# Altium PCB CZ101_V1.0.PcbDoc
Units mm, origin at the board's own origin, x right, y up, seen from the top; angles counter-clockwise.
Board outline 46 x 48 mm, 2 copper layers (Top Layer, Bottom Layer); 51 components, 31 nets, 122 pads, 0 vias.
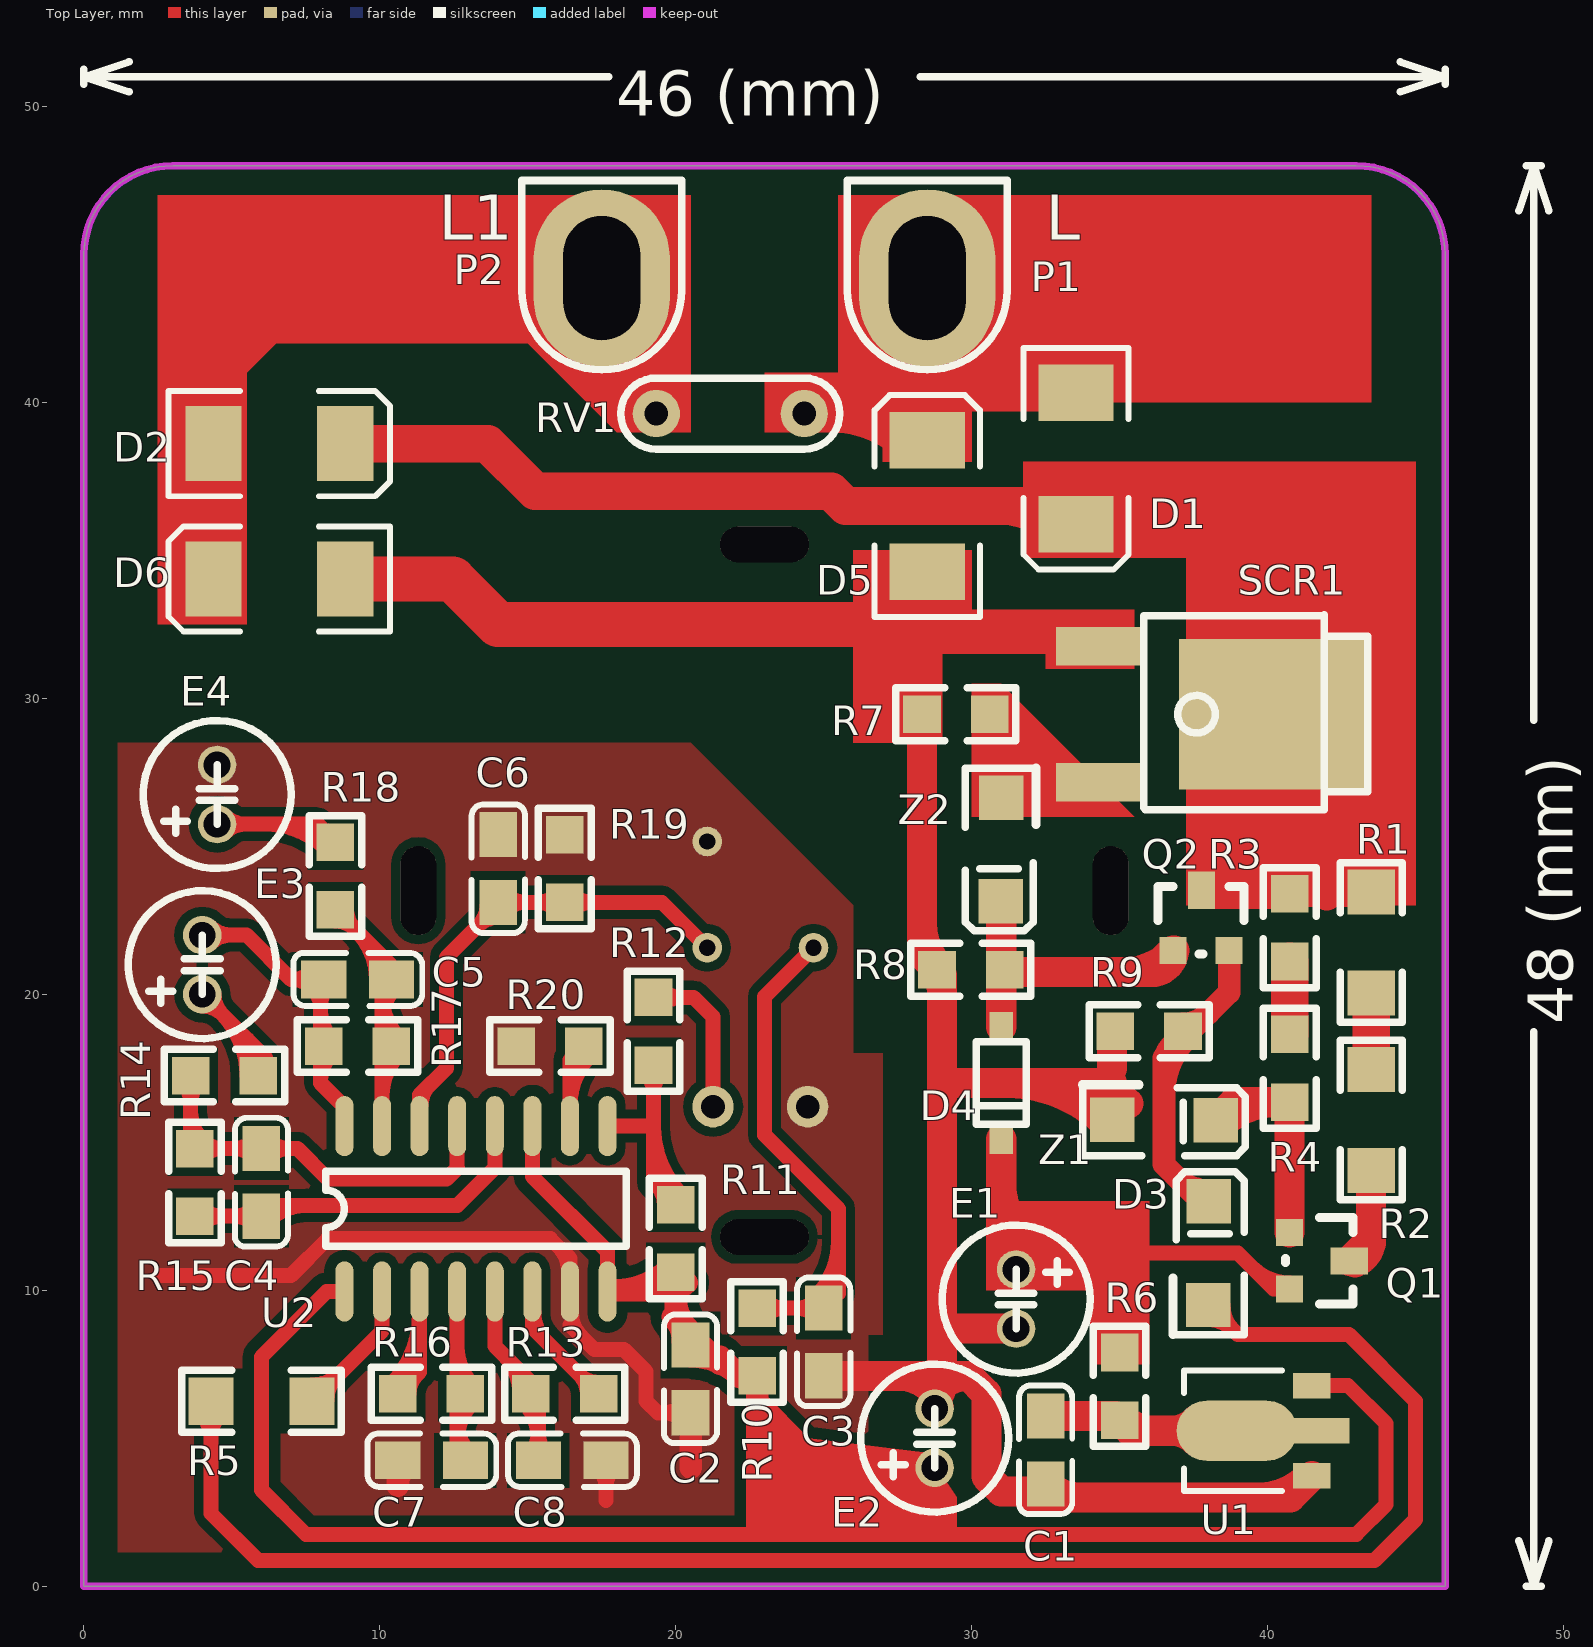
[diagram p0: Top Layer view]
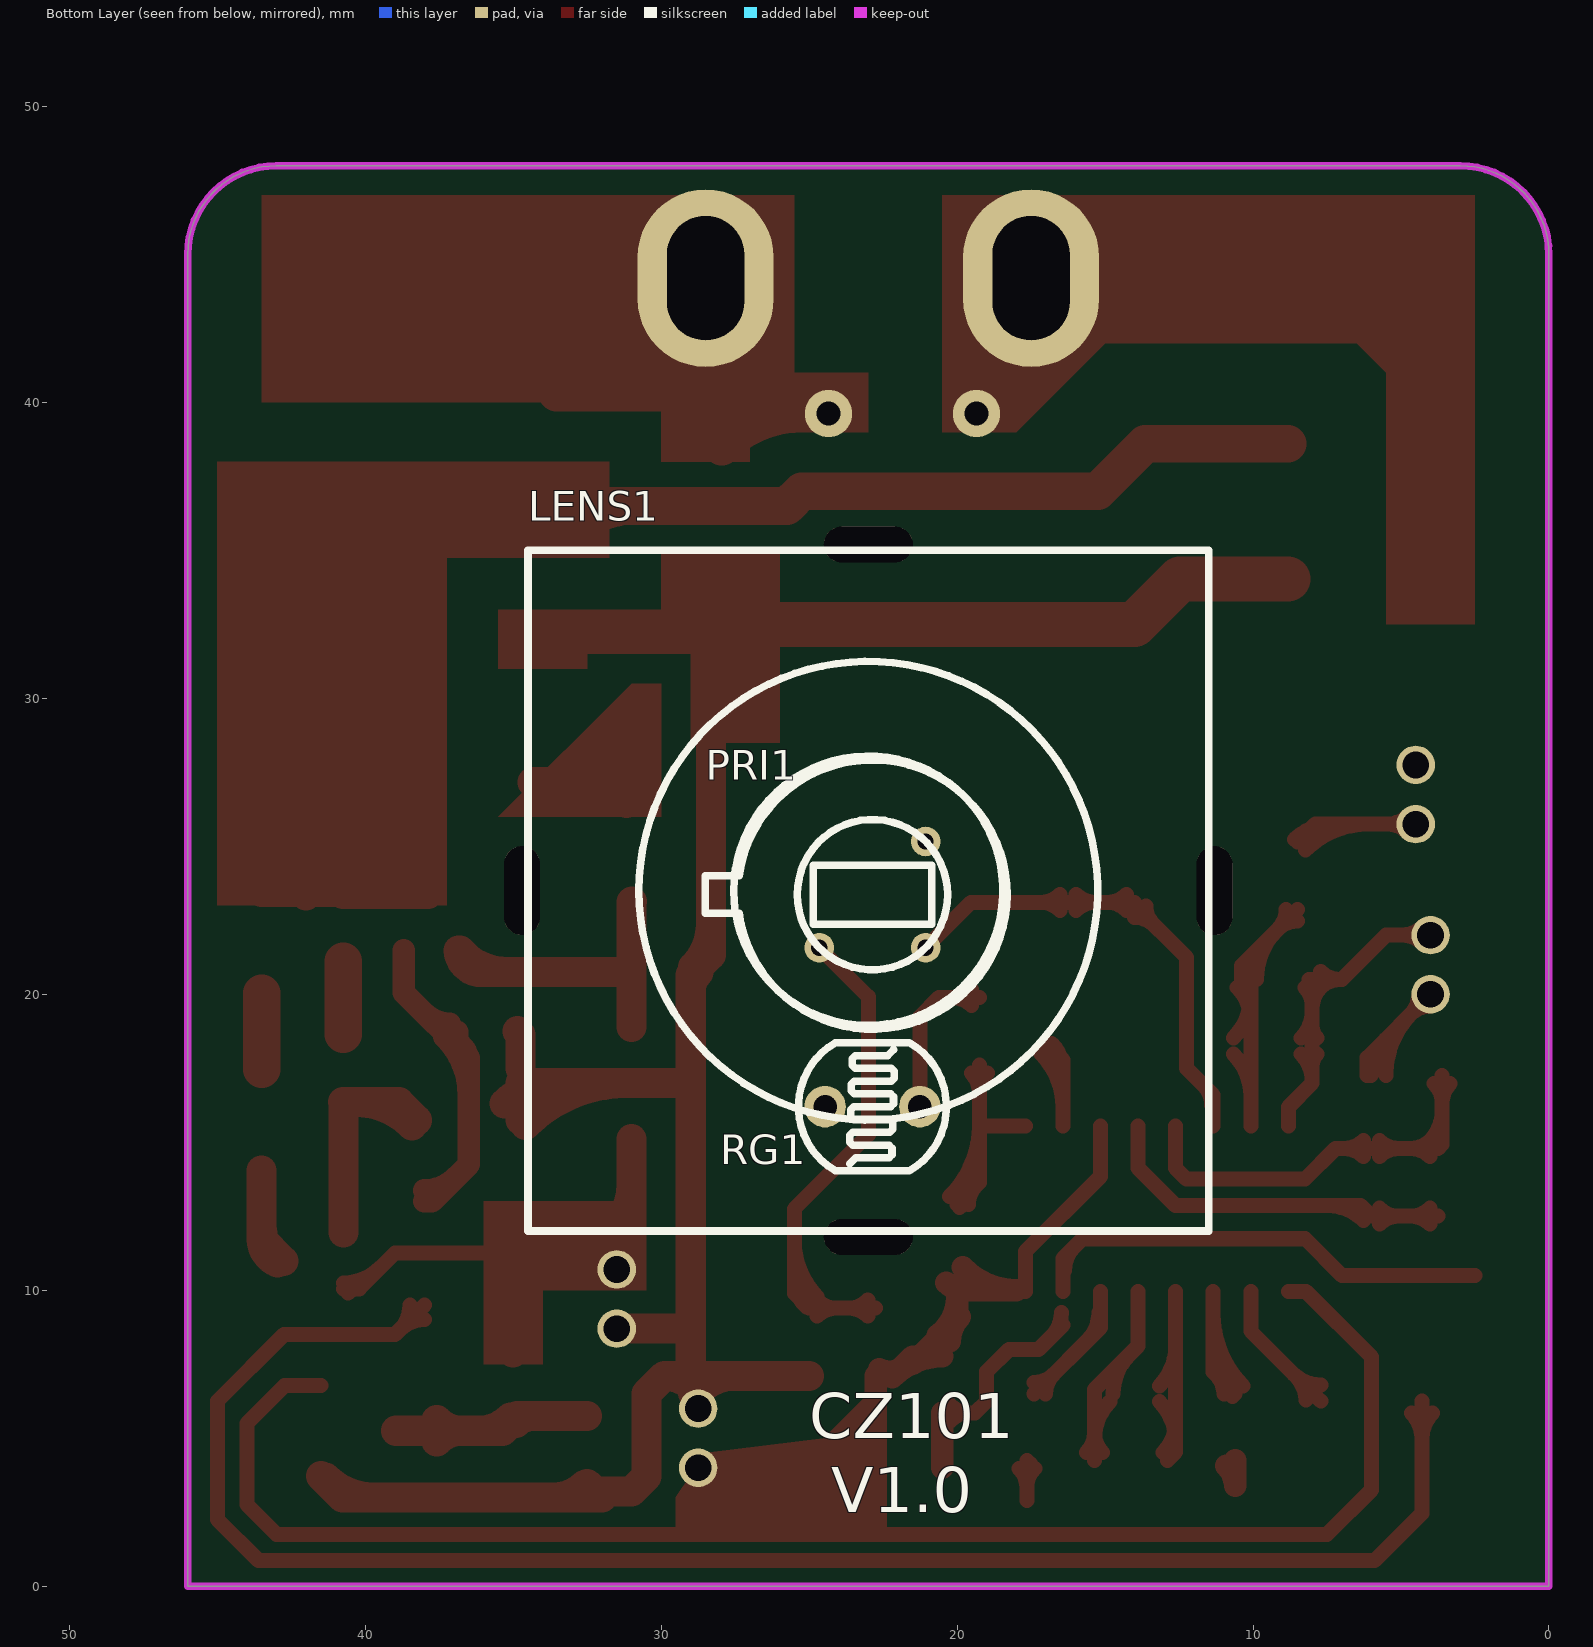
[diagram p1: Bottom Layer view, seen from below]

## Layer stack, top to bottom
Top Layer: signal copper 0.0356
Dielectric: dielectric 0.32, FR-4, Dk 4.8
Bottom Layer: signal copper 0.0356

## Board outline
0,0 46,0 46,45 ccw(c43,45) 43,48 3,48 ccw(c3,45) 0,45

## Design rules (kind name [scope] priority, off if disabled: settings)
Clearance "InPolygon to Keep-Out Layer" [InPolygon vs OnLayer('Keep-Out Layer')] p1: gap=1
Clearance "GND to +3.3V" [InNet('GND') vs InNet('+3.3V')] p2: gap=0.381
Clearance "GND to All" [InNet('GND')] p3: gap=0.305
Clearance [All] p4: gap=0.254
HoleSize [All] p1: absolutevalues=TRUE maxlimit=25.4 minlimit=0.025 maxpercent=80.000 minpercent=20.000
MinimumSolderMaskSliver [All] p1: minsoldermaskwidth=0
PolygonConnect [All] p1: connectstyle=Direct reliefconductorwidth=0.254 reliefentries=4 polygonreliefangle="90 Angle"
RoutingVias [All] p1: holewidth=0.711 width=1.27 viastyle="Through Hole" minholewidth=0.711 minwidth=1.27 maxholewidth=0.711 maxwidth=1.27
SilkToSilkClearance [All] p1: silktosilkclearance=0
SilkscreenOverComponentPads [All] p1: minsilkscreentomaskgap=0
SolderMaskExpansion [All] p1: expansion=0.102
Width [All] p1: maxlimit=25.4 minlimit=0.254 preferedwidth=0.254
24 further rules are at their usual default settings.

## Components (designator, comment, footprint, x,y, rotation, side; value= is the part's Value field where it differs from the comment)
C1 "100nF" 0805_C1 32.5,4.6 r270 top
C2 "100nF" 0805_C1 20.5,7 r270 top
C3 "100nF" 0805_C1 25,8.25 r270 top
C4 "10nF" 0805_C1 6,13.643 r270 top
C5 "10nF" 0805_C1 9.25,20.5 r180 top
C6 "10nF" 0805_C1 14,24.25 r90 top
C7 "10nF" 0805_C1 11.75,4.25 r180 top
C8 "100nF" 0805_C1 16.5,4.25 r180 top
D1 "M7" DO-214AC(SMA) 33.528,38.1 r90 top
D2 "M7" DO-214AC(SMA) 6.604,38.608 r180 top
D3 "IN4148" LL-34 38,11.25 r270 top
D4 "1N4007W/A7" SOD-123 31,17 r90 top
D5 "M7" DO-214AC(SMA) 28.5,36.5 r270 top
D6 "M7" DO-214AC(SMA) 6.604,34.036 r0 top
E1 "47uF/25V" CS_47uF/25V 31.5,9.7 r270 top
E2 "47uF/25V" CS_47uF/25V 28.75,5 r90 top
E3 "22uF/50V" CS_47uF/25V 4,21 r90 top
E4 "22uF/50V" CS_47uF/25V 4.5,26.75 r90 top
LENS1 "Fresnel lens" "Fresnel lens" 23,23.5 r180 bottom locked
P1 "L" CP3M*8.8 28.5,47.5 r180 top locked
P2 "L1" CP3M*8.8 17.5,47.5 r180 top locked
PRI1 "D203S" D203S 22.86,23.368 r315 bottom locked
Q1 "MMBTA44/3D" SOT-23 41.75,11 r270 top
Q2 "MCR100-6/MCR16" SOT-23 37.75,22.5 r0 top
R1 "200K" 1206_R 43.5,21.75 r270 top
R2 "200K" 1206_R 43.5,15.75 r270 top
R3 "20M" 0805_R 40.75,22.25 r270 top
R4 "20M" 0805_R 40.75,17.5 r270 top
R5 "10K" 1206_R 6,6.25 r0 top
R6 "510R" 0805_R 35,6.75 r270 top
R7 "47K" 0805_R 29.464,29.464 r0 top
R8 "1K" 0805_R 29.972,20.828 r0 top
R9 "47K" 0805_R 36,18.75 r0 top
R10 "10K" 0805_R 22.75,8.25 r270 top
R11 "1M" 0805_R 20,11.75 r270 top
R12 "180K" 0805_R 19.25,18.75 r270 top
R13 "1M" 0805_R 16.25,6.5 r180 top
R14 "10K" 0805_R 4.75,17.25 r180 top
R15 "1.5M" 0805_R 3.75,13.643 r270 top
R16 "180K" 0805_R 11.75,6.5 r180 top
R17 "2M" 0805_R 9.25,18.25 r0 top
R18 "47K" 0805_R 8.5,24 r270 top
R19 "47K" 0805_R 16.25,24.25 r270 top
R20 "1.5M" 0805_R 15.75,18.25 r0 top
RG1 "GL5528" R5537 22.86,16.2 r180 bottom locked
RV1 "07D471K" RV-5MM 21.844,39.624 r0 top
SCR1 "BT136" TO-252 37.592,29.464 r270 top
U1 "HT7533-1" SOT-89 41.5,5.25 r90 top
U2 "BISS0001" SO-16 13.25,12.75 r90 top
Z1 "ZMM5V6" LL-34 36.5,15.75 r180 top
Z2 "ZMM5V6" LL-34 30.988,24.892 r90 top

## Footprints (in the part's own frame and the unit in brackets; to place one, negate y for a bottom-side part, rotate by r counter-clockwise, add the part's x,y. Pads: shape width x height; smd on the part's side, far side on the other; paste and mask are expansions set on the pad)
0805_C1 [mil]
  rect 60x50 smd: 1(-45,0) 2(45,0)
  silkscreen extent -86,-35 85,35
0805_R [mil] "SMD Resistor"
  rect 50x50 smd: 1(-45,0) 2(45,0)
  silkscreen extent -80,-35 80,35
1206_R [mm] "SMD Resistor"
  rect 1.52x1.6 smd: 1(-1.71,0) 2(1.71,0)
  silkscreen extent -2.7,-1.05 2.7,1.05
CP3M*8.8 [mm]
  oval 4.6x6 hole 2.6 slot 4.2 at 90 deg: 1(0,3.3)
  silkscreen extent -2.7,0 2.7,6.4
CS_47uF/25V [mm] "PTH  Electrolytic  Capacitor"
  round 1.3 hole 0.9: 1(-1,0) 2(1,0)
  silkscreen extent -2.5,-2.5 2.5,2.5
D203S [mm] "D203S, KP500BP"
  round 1 hole 0.55: 1(2.54,0) 2(0,2.54) 3(-2.54,0)
  silkscreen extent -4.55,-4.55 4.55,4.55
DO-214AC(SMA) [mil] "SMD Diode"
  rect 75x100 smd: A(87.5,0) K(-87.5,0)
  silkscreen extent -147,-70 148,70
"Fresnel lens" [mm]
  oval 1.2x3 hole 1.2 slot 3 at 90 deg unplated: 0(-11.7,0) 0(11.7,0)
  oval 3x1.2 hole 1.2 slot 3 at 0 deg unplated: 0(0,-11.7) 0(0,11.7)
  silkscreen extent -11.5,-11.5 11.5,11.5
LL-34 [mm] "SMD Diode"
  rect 1.5x1.5 smd: A(1.75,-0.008) K(-1.75,0.008)
  silkscreen extent -2.75,-1.19 2.75,1.21
R5537 [mm] "PTH Light dependent resistors"
  round 1.4 hole 0.8: 1(-1.6,0) 2(1.6,0)
  silkscreen extent -2.5,-2.17 2.5,2.17
RV-5MM [mm]
  round 1.6 hole 0.8: 1(-2.5,0) 2(2.5,0)
  silkscreen extent -3.7,-1.2 3.7,1.2
SO-16 [mil]
  oval 80x24 smd: 1(-110,175) 2(-110,125) 3(-110,75) 4(-110,25) 5(-110,-25) 6(-110,-75) 7(-110,-125) 8(-110,-175) 9(110,-175) 10(110,-125) 11(110,-75) 12(110,-25) 13(110,25) 14(110,75) 15(110,125) 16(110,175)
  silkscreen extent -50,-200 50,200
SOD-123 [mm] "SMD Diode"
  rect 1x0.8 smd: A(1.9,0) K(-1.9,0)
  silkscreen extent -1.4,-0.85 1.4,0.85
SOT-23 [mil] "SMD Triode Or Diode"
  rect 36x36 smd: 1(-37.5,-40) 2(37.5,-40)
  rect 36x50 smd: 3(0.5,40)
  silkscreen extent -58,-45 58,45
SOT-89 [mil] "SMD Diode"
  rect 34x50 smd: 1(-60,0) 3(60,0)
  oval 80x160 smd: 2(0,100)
  rect 34x100 smd: 2(0,0)
  silkscreen extent -80,40 80,170
TO-252 [mm] "SMD IC"
  rect 1.3x3 smd: 1(-2.3,-3.245) 3(2.3,-3.245)
  rect 5.08x6.35 smd: 2(0,2.592)
  silkscreen extent -3.35,-1.78 3.22,5.79

## Part data
C1 C2 C3 C4 C5 C6 C7 C8: library part Cap1
D1 D2 D4 D5 D6: library part Diode-A, "SS14,SS24,SS34,M7"
D3 Z1 Z2: library part Diode-B
E1 E2 E3 E4: library part "Cap Pol1"
P1 P2: library part "Header 1", "Header, 1-Pin"
PRI1: "D203S, KP500BP"
Q1: library part 8050
Q2: library part MCR100-8, "Silicon Controlled Rectifier"
R1 R2 R3 R4 R5 R6 R7 R8 R9 R10 R11 R12 R13 R14 R15 R16 R17 R18 R19 R20: library part Res1
RG1: library part GL5539
RV1: library part "Res Piezo Varistor"
SCR1: library part TRIAC
U1: library part HT7833, "HT7533; Output 500mA; Iq: 5uA, max= 7uA"
U2: "BISS0001, CSC0001"

## Nets (pads, with @x,y where several pads share a name; then routed paths per layer and width w, separated by ;. In a path a pad name is that pad's centre, name@x,y a point inside that pad or via, vN(x,y) a via of type N, cw(c..) or ccw(c..) an arc to the next point about the centre after c; other vN are vias at no path point)
+3.3V: C2.1 E2.1 R10.2 R11.2 U1.3 U2.1 U2.8 U2.11 | length 133.4
  Top Layer w0.508: U2.1 8.206,9.956 6,7.75 6,3.25 7.5,1.75 43,1.75 44,2.75 44,5.5 42.726,6.774 U1.3 ; U2.11 15.155,13.845 17.695,11.305 U2.8
  Top Layer w0.762: 22.75,2 22.75,4.75 ; 25,3.5 23.75,4.75 22.75,4.75 ; 18,10 ccw(c18,12.499) R11.2@19.815,10.782 ; 18,10 ccw(c18,12.499) R11.2@19.815,10.782 ; 18,10 ccw(c18,12.499) R11.2@19.815,10.782 ; 18,10 ccw(c18,12.499) R11.2@19.815,10.782 ; 18,10 ccw(c18,12.499) R11.2@19.815,10.782 ; 18,10 19.75,10 20,9.75 ; R11.2@19.77,10 ccw(c19.77,10.825) R11.2@20.369,10.258 ; R11.2@19.77,10 ccw(c19.77,10.825) R11.2@20.369,10.258 ; R11.2@19.77,10 ccw(c19.77,10.825) R11.2@20.369,10.258 ; R11.2@19.77,10 ccw(c19.77,10.825) R11.2@20.369,10.258 ; R11.2@19.77,10 ccw(c19.77,10.825) R11.2@20.369,10.258 ; 19.904,9.096 cw(c19.078,8.27) C2.1@20.246,8.27 ; 19.904,9.096 cw(c19.078,8.27) C2.1@20.246,8.27 ; 19.904,9.096 cw(c19.078,8.27) C2.1@20.246,8.27 ; 19.904,9.096 cw(c19.078,8.27) C2.1@20.246,8.27 ; 19.904,9.096 cw(c19.078,8.27) C2.1@20.246,8.27 ; 20,9.75 ccw(c21.575,9.75) C2.1@20.649,8.475 ; 20,9.75 ccw(c21.575,9.75) C2.1@20.649,8.475 ; 20,9.75 ccw(c21.575,9.75) C2.1@20.649,8.475 ; 20,9.75 ccw(c21.575,9.75) C2.1@20.649,8.475 ; 20,9.75 ccw(c21.575,9.75) C2.1@20.649,8.475 ; 20,9.75 20,9 21.25,7.75 ; C2.1@20.5,7.762 cw(c20.5,5.377) R10.2@22.187,7.063 ; C2.1@20.5,7.762 cw(c20.5,5.377) R10.2@22.187,7.063 ; C2.1@20.5,7.762 cw(c20.5,5.377) R10.2@22.187,7.063 ; C2.1@20.5,7.762 cw(c20.5,5.377) R10.2@22.187,7.063 ; C2.1@20.5,7.762 cw(c20.5,5.377) R10.2@22.187,7.063 ; C2.1@20.554,7.768 cw(c20.859,6.375) 21.867,7.383 ; C2.1@20.554,7.768 cw(c20.859,6.375) 21.867,7.383 ; C2.1@20.554,7.768 cw(c20.859,6.375) 21.867,7.383 ; C2.1@20.554,7.768 cw(c20.859,6.375) 21.867,7.383 ; C2.1@20.554,7.768 cw(c20.859,6.375) 21.867,7.383 ; C2.1@20.56,7.769 cw(c20.794,6.81) 21.492,7.508 ; C2.1@20.56,7.769 cw(c20.794,6.81) 21.492,7.508 ; C2.1@20.56,7.769 cw(c20.794,6.81) 21.492,7.508 ; C2.1@20.56,7.769 cw(c20.794,6.81) 21.492,7.508 ; C2.1@20.56,7.769 cw(c20.794,6.81) 21.492,7.508 ; C2.1@20.708,8.162 ccw(c21.5,8.717) 21.5,7.75 ; C2.1@20.708,8.162 ccw(c21.5,8.717) 21.5,7.75 ; C2.1@20.708,8.162 ccw(c21.5,8.717) 21.5,7.75 ; C2.1@20.708,8.162 ccw(c21.5,8.717) 21.5,7.75 ; C2.1@20.708,8.162 ccw(c21.5,8.717) 21.5,7.75 ; C2.1@20.738,8.105 ccw(c21.25,8.297) 21.25,7.75 ; C2.1@20.738,8.105 ccw(c21.25,8.297) 21.25,7.75 ; C2.1@20.738,8.105 ccw(c21.25,8.297) 21.25,7.75 ; C2.1@20.738,8.105 ccw(c21.25,8.297) 21.25,7.75 ; C2.1@20.738,8.105 ccw(c21.25,8.297) 21.25,7.75 ; 21.25,7.75 21.5,7.75 ; 21.5,7.75 22.143,7.107 R10.2 22.75,4.75 ; 21.804,7.446 ccw(c22.293,7.936) R10.2@22.627,7.329 ; 21.804,7.446 ccw(c22.293,7.936) R10.2@22.627,7.329 ; 21.804,7.446 ccw(c22.293,7.936) R10.2@22.627,7.329 ; 21.804,7.446 ccw(c22.293,7.936) R10.2@22.627,7.329 ; 21.804,7.446 ccw(c22.293,7.936) R10.2@22.627,7.329
GND: C1.2 C2.2 C3.2 C6.2 C7.2 C8.1 D5.A D6.A E1.2 E2.2 E4.2 PRI1.3 R7.1 R8.1 R9.1 R19.1 R20.1 RG1.1 SCR1.1 U1.1 U2.7 Z1.A | length 172.9
  Top Layer w0.508: 2.5,10.5 7,10.5 8.238,11.738 15.262,11.738 15.762,11.738 16.425,11.075 U2.7 ; 16.425,8.825 17.25,8 18.25,8 19,7.25 19,6.25 19.393,5.857 C2.2 ; C8.1@17.5,4.107 C8.1 17.643,2.893 ; 16.05,11.45 cw(c15.267,10.667) U2.7@16.374,10.667 ; 16.05,11.45 cw(c15.267,10.667) U2.7@16.374,10.667 ; 16.05,11.45 cw(c15.267,10.667) U2.7@16.374,10.667 ; 16.05,11.45 cw(c15.267,10.667) U2.7@16.374,10.667 ; 16.05,11.45 cw(c15.267,10.667) U2.7@16.374,10.667 ; U2.7@16.476,9.245 ccw(c17.612,9.245) 16.809,8.441 ; U2.7@16.476,9.245 ccw(c17.612,9.245) 16.809,8.441 ; U2.7@16.476,9.245 ccw(c17.612,9.245) 16.809,8.441 ; U2.7@16.476,9.245 ccw(c17.612,9.245) 16.809,8.441 ; U2.7@16.476,9.245 ccw(c17.612,9.245) 16.809,8.441 ; C8.1@17.374,3.981 cw(c16.723,3.33) 17.643,3.33 ; C8.1@17.374,3.981 cw(c16.723,3.33) 17.643,3.33 ; C8.1@17.374,3.981 cw(c16.723,3.33) 17.643,3.33 ; C8.1@17.374,3.981 cw(c16.723,3.33) 17.643,3.33 ; C8.1@17.374,3.981 cw(c16.723,3.33) 17.643,3.33 ; 17.643,3.33 cw(c18.563,3.33) C8.1@17.912,3.981 ; 17.643,3.33 cw(c18.563,3.33) C8.1@17.912,3.981 ; 17.643,3.33 cw(c18.563,3.33) C8.1@17.912,3.981 ; 17.643,3.33 cw(c18.563,3.33) C8.1@17.912,3.981 ; 17.643,3.33 cw(c18.563,3.33) C8.1@17.912,3.981 ; 19.58,5.857 cw(c19.58,4.937) C2.2@20.231,5.588 ; 19.58,5.857 ccw(c19.58,6.777) C2.2@20.231,6.126 ; 19.58,5.857 cw(c19.58,4.937) C2.2@20.231,5.588 ; 19.58,5.857 ccw(c19.58,6.777) C2.2@20.231,6.126 ; 19.58,5.857 cw(c19.58,4.937) C2.2@20.231,5.588 ; 19.58,5.857 ccw(c19.58,6.777) C2.2@20.231,6.126 ; 19.58,5.857 cw(c19.58,4.937) C2.2@20.231,5.588 ; 19.58,5.857 ccw(c19.58,6.777) C2.2@20.231,6.126 ; 19.58,5.857 ccw(c19.58,6.777) C2.2@20.231,6.126 ; 19.58,5.857 cw(c19.58,4.937) C2.2@20.231,5.588
  Top Layer w0.762: 10.607,3.393 C7.2 ; 20.5,4 C2.2 ; 10.607,3.384 cw(c11.528,3.384) C7.2@10.906,4.063 ; 10.607,3.384 cw(c11.528,3.384) C7.2@10.906,4.063 ; 10.607,3.384 cw(c11.528,3.384) C7.2@10.906,4.063
  Top Layer w1.016: C3.2 28.393,7.107 ; R7.1 28.321,21.336 29,20.657 29,17 ; 28.75,6.75 29,7 ; E2.2@28.874,6.07 cw(c29.548,6.452) 29,7 ; 31.166,17 cw(c31.166,12.174) Z1.A@34.579,15.586 ; E1.2 29,8.7 ; C1.2@32,3 40.774,3 U1.1 ; C1.2 32.243,3.2 31,3.2 30.5,3.7 30.5,5.1 30.5,6.5 29.893,7.107 ; C1.2@32.59,3.42 ccw(c33.603,4.433) 33.603,3 ; 33.619,17 cw(c33.619,14.627) Z1.A@35.297,16.305 ; Z1.A 34.75,17 29,17 ; 34.75,17.5 34.75,18.643 R9.1 ; 27.545,7.107 cw(c27.545,5.545) 28.65,6.65 ; 27.545,7.107 cw(c27.545,5.545) 28.65,6.65 ; 27.545,7.107 cw(c27.545,5.545) 28.65,6.65 ; 28.321,22.361 ccw(c30.362,22.361) R8.1@28.919,20.918 ; 28.321,22.361 ccw(c30.362,22.361) R8.1@28.919,20.918 ; 28.321,22.361 ccw(c30.362,22.361) R8.1@28.919,20.918 ; 28.321,22.361 ccw(c30.362,22.361) R8.1@28.919,20.918 ; E2.2@28.65,6.1 ccw(c27.804,6.946) 29,6.946 ; E2.2@28.65,6.1 ccw(c27.804,6.946) 29,6.946 ; E2.2@28.65,6.1 ccw(c27.804,6.946) 29,6.946 ; E2.2@28.65,6.1 ccw(c27.804,6.946) 29,6.946 ; 28.65,6.85 ccw(c27.804,7.696) 29,7.696 ; 28.65,6.85 ccw(c27.804,7.696) 29,7.696 ; 28.65,6.85 ccw(c27.804,7.696) 29,7.696 ; R8.1@28.739,20.738 cw(c28.11,20.109) 29,20.109 ; R8.1@28.739,20.738 cw(c28.11,20.109) 29,20.109 ; R8.1@28.739,20.738 cw(c28.11,20.109) 29,20.109 ; R8.1@28.739,20.738 cw(c28.11,20.109) 29,20.109 ; 28.854,6.653 cw(c29.893,5.691) 29.893,7.107 ; 28.854,6.653 cw(c29.893,5.691) 29.893,7.107 ; 28.854,6.653 cw(c29.893,5.691) 29.893,7.107 ; 29,7 29,7.107 ; 29,7.107 29.893,7.107 ; 29,7.107 29,8.7 ; 29,8.7 29,17 ; 39.728,3 ccw(c39.728,5.295) U1.1@41.351,3.672 ; 39.728,3 ccw(c39.728,5.295) U1.1@41.351,3.672 ; 39.728,3 ccw(c39.728,5.295) U1.1@41.351,3.672 ; 39.728,3 ccw(c39.728,5.295) U1.1@41.351,3.672
  Top Layer w1.524: D6.A 12.464,34.036 14,32.5 27,32.5 27.5,33 ; 27.437,32.937 ccw(c26.096,34.278) D5.A@27.992,34.278 ; 27.437,32.937 ccw(c26.096,34.278) D5.A@27.992,34.278 ; 27.437,32.937 ccw(c26.096,34.278) D5.A@27.992,34.278 ; 27.437,32.937 ccw(c26.096,34.278) D5.A@27.992,34.278 ; 27.798,33.298 ccw(c27.177,33.918) D5.A@28.003,34.213 ; 27.798,33.298 ccw(c27.177,33.918) D5.A@28.003,34.213 ; 27.798,33.298 ccw(c27.177,33.918) D5.A@28.003,34.213 ; 27.798,33.298 ccw(c27.177,33.918) D5.A@28.003,34.213
L: D1.A D5.K P1.1 RV1.2 | length 48
  Top Layer w1.27: RV1.2 28.376,39.624 D5.K@28.5,39.5 ; D5.K D5.K@28.5,39.5 ; P1.1@28.5,44 28.5,40.5 ; D1.A 28.677,40.322 28.5,40.5 ; 25.24,39.624 cw(c25.24,35.78) D5.K@27.958,38.498 ; 25.24,39.624 cw(c25.24,35.78) D5.K@27.958,38.498 ; 25.24,39.624 cw(c25.24,35.78) D5.K@27.958,38.498 ; 25.24,39.624 cw(c25.24,35.78) D5.K@27.958,38.498 ; 25.24,39.624 cw(c25.24,35.78) D5.K@27.958,38.498 ; P1.1@27.818,42.418 cw(c26.17,40.77) 28.5,40.77 ; P1.1@27.818,42.418 cw(c26.17,40.77) 28.5,40.77 ; P1.1@27.818,42.418 cw(c26.17,40.77) 28.5,40.77 ; P1.1@27.818,42.418 cw(c26.17,40.77) 28.5,40.77 ; P1.1@27.818,42.418 cw(c26.17,40.77) 28.5,40.77 ; D5.K@28.5,39.5 28.5,40.5 ; 28.5,40.77 cw(c30.83,40.77) P1.1@29.182,42.418 ; 28.5,40.77 cw(c30.83,40.77) P1.1@29.182,42.418 ; 28.5,40.77 cw(c30.83,40.77) P1.1@29.182,42.418 ; 28.5,40.77 cw(c30.83,40.77) P1.1@29.182,42.418 ; 28.5,40.77 cw(c30.83,40.77) P1.1@29.182,42.418
L1: D2.A D6.K P2.1 RV1.1 | length 71
  Top Layer w1.27: D6.K 4.5,34.155 4.5,42.5 6,44 17.5,44 17.5,41.468 RV1.1 ; D6.K@4.157,34.578 ccw(c3.329,35.406) 4.5,35.406 ; D6.K@4.157,34.578 ccw(c3.329,35.406) 4.5,35.406 ; D6.K@4.157,34.578 ccw(c3.329,35.406) 4.5,35.406 ; D6.K@4.157,34.578 ccw(c3.329,35.406) 4.5,35.406 ; D6.K@4.157,34.578 ccw(c3.329,35.406) 4.5,35.406 ; D2.A@4.157,38.066 cw(c3.329,37.238) 4.5,37.238 ; D2.A@4.157,38.066 cw(c3.329,37.238) 4.5,37.238 ; D2.A@4.157,38.066 cw(c3.329,37.238) 4.5,37.238 ; D2.A@4.157,38.066 cw(c3.329,37.238) 4.5,37.238 ; D2.A@4.157,38.066 cw(c3.329,37.238) 4.5,37.238 ; D2.A@4.157,39.15 ccw(c3.329,39.978) 4.5,39.978 ; D2.A@4.157,39.15 ccw(c3.329,39.978) 4.5,39.978 ; D2.A@4.157,39.15 ccw(c3.329,39.978) 4.5,39.978 ; D2.A@4.157,39.15 ccw(c3.329,39.978) 4.5,39.978 ; D2.A@4.157,39.15 ccw(c3.329,39.978) 4.5,39.978 ; 15.17,44 cw(c15.17,41.67) P2.1@16.818,43.318 ; 15.17,44 ccw(c15.17,46.33) P2.1@16.818,44.682 ; 15.17,44 cw(c15.17,41.67) P2.1@16.818,43.318 ; 15.17,44 ccw(c15.17,46.33) P2.1@16.818,44.682 ; 15.17,44 cw(c15.17,41.67) P2.1@16.818,43.318 ; 15.17,44 ccw(c15.17,46.33) P2.1@16.818,44.682 ; 15.17,44 cw(c15.17,41.67) P2.1@16.818,43.318 ; 15.17,44 ccw(c15.17,46.33) P2.1@16.818,44.682 ; 15.17,44 ccw(c15.17,46.33) P2.1@16.818,44.682 ; 15.17,44 cw(c15.17,41.67) P2.1@16.818,43.318 ; P2.1@18.308,42.572 ccw(c19.729,41.641) 18.528,40.44 ; P2.1@18.308,42.572 ccw(c19.729,41.641) 18.528,40.44 ; P2.1@18.308,42.572 ccw(c19.729,41.641) 18.528,40.44 ; P2.1@18.308,42.572 ccw(c19.729,41.641) 18.528,40.44 ; P2.1@18.308,42.572 ccw(c19.729,41.641) 18.528,40.44
LAMP_CTR: R5.2 U2.2 | length 14.3
  Top Layer w0.508: R5.2 10.075,8.615 U2.2 ; R5.2@7.71,6.796 ccw(c7.71,8.114) 8.642,7.182 ; R5.2@7.71,6.796 ccw(c7.71,8.114) 8.642,7.182 ; R5.2@7.71,6.796 ccw(c7.71,8.114) 8.642,7.182 ; R5.2@7.71,6.796 ccw(c7.71,8.114) 8.642,7.182 ; R5.2@7.71,6.796 ccw(c7.71,8.114) 8.642,7.182 ; R5.2@8.216,6.29 cw(c9.341,6.29) 8.546,7.086 ; R5.2@8.216,6.29 cw(c9.341,6.29) 8.546,7.086 ; R5.2@8.216,6.29 cw(c9.341,6.29) 8.546,7.086 ; R5.2@8.216,6.29 cw(c9.341,6.29) 8.546,7.086 ; R5.2@8.216,6.29 cw(c9.341,6.29) 8.546,7.086
NetC1_1: C1.1 R6.2 U1.2 | length 19.8
  Top Layer w1.016: C1.1 34.864,5.743 R6.2 35.357,5.25 U1.2@38.96,5.25 ; R6.2@34.365,5.743 cw(c34.365,4.972) R6.2@34.91,5.517 ; R6.2@35.09,5.697 ccw(c36.168,6.775) 36.168,5.25 ; R6.2@35.09,5.697 ccw(c36.168,6.775) 36.168,5.25 ; R6.2@35.09,5.697 ccw(c36.168,6.775) 36.168,5.25 ; R6.2@35.09,5.697 ccw(c36.168,6.775) 36.168,5.25 ; 36.718,5.25 cw(c36.718,4.024) U1.2@37.585,4.891 ; 36.718,5.25 ccw(c36.718,6.476) U1.2@37.585,5.609 ; 36.718,5.25 cw(c36.718,4.024) U1.2@37.585,4.891 ; 36.718,5.25 ccw(c36.718,6.476) U1.2@37.585,5.609 ; 36.718,5.25 cw(c36.718,4.024) U1.2@37.585,4.891 ; 36.718,5.25 ccw(c36.718,6.476) U1.2@37.585,5.609 ; 36.718,5.25 ccw(c36.718,6.476) U1.2@37.585,5.609 ; 36.718,5.25 cw(c36.718,4.024) U1.2@37.585,4.891
NetC3_1: C3.1 PRI1.1 R10.1 | length 46.6
  Top Layer w0.508: R10.1 C3.1 25.5,9.893 25.5,12.75 23,15.25 23,19.916 PRI1.1 PRI1.1@24.678,21.572 ; R10.1@23.019,9.124 cw(c23.67,8.473) 23.67,9.393 ; R10.1@23.019,9.124 cw(c23.67,8.473) 23.67,9.393 ; R10.1@23.019,9.124 cw(c23.67,8.473) 23.67,9.393 ; R10.1@23.019,9.124 cw(c23.67,8.473) 23.67,9.393 ; R10.1@23.019,9.124 cw(c23.67,8.473) 23.67,9.393 ; R10.1@23.019,9.662 ccw(c23.67,10.313) 23.67,9.393 ; R10.1@23.019,9.662 ccw(c23.67,10.313) 23.67,9.393 ; R10.1@23.019,9.662 ccw(c23.67,10.313) 23.67,9.393 ; R10.1@23.019,9.662 ccw(c23.67,10.313) 23.67,9.393 ; R10.1@23.019,9.662 ccw(c23.67,10.313) 23.67,9.393 ; 24.08,9.393 cw(c24.08,8.473) C3.1@24.731,9.124 ; 24.08,9.393 ccw(c24.08,10.313) C3.1@24.731,9.662 ; 24.08,9.393 cw(c24.08,8.473) C3.1@24.731,9.124 ; 24.08,9.393 ccw(c24.08,10.313) C3.1@24.731,9.662 ; 24.08,9.393 cw(c24.08,8.473) C3.1@24.731,9.124 ; 24.08,9.393 ccw(c24.08,10.313) C3.1@24.731,9.662 ; 24.08,9.393 cw(c24.08,8.473) C3.1@24.731,9.124 ; 24.08,9.393 ccw(c24.08,10.313) C3.1@24.731,9.662 ; 24.08,9.393 ccw(c24.08,10.313) C3.1@24.731,9.662 ; 24.08,9.393 cw(c24.08,8.473) C3.1@24.731,9.124 ; C3.1@24.731,9.789 ccw(c22.873,11.647) 25.5,11.647 ; C3.1@24.731,9.789 ccw(c22.873,11.647) 25.5,11.647 ; C3.1@24.731,9.789 ccw(c22.873,11.647) 25.5,11.647 ; C3.1@24.731,9.789 ccw(c22.873,11.647) 25.5,11.647 ; C3.1@24.731,9.789 ccw(c22.873,11.647) 25.5,11.647 ; C3.1@25.09,9.43 ccw(c24.1,10.42) 25.5,10.42 ; C3.1@25.09,9.43 ccw(c24.1,10.42) 25.5,10.42 ; C3.1@25.09,9.43 ccw(c24.1,10.42) 25.5,10.42 ; C3.1@25.09,9.43 ccw(c24.1,10.42) 25.5,10.42 ; C3.1@25.09,9.43 ccw(c24.1,10.42) 25.5,10.42
NetC4_1: C4.1 R14.2 R15.1 U2.13 | length 47.8
  Top Layer w0.508: R14.2 3.607,14.929 R15.1 3.857,14.786 C4.1 7.214,14.786 8.25,13.75 12.25,13.75 12.625,14.125 12.615,14.135 U2.13 ; R14.2@3.338,16.981 cw(c2.687,16.33) 3.607,16.33 ; R14.2@3.338,16.981 cw(c2.687,16.33) 3.607,16.33 ; R14.2@3.338,16.981 cw(c2.687,16.33) 3.607,16.33 ; R14.2@3.338,16.981 cw(c2.687,16.33) 3.607,16.33 ; R14.2@3.338,16.981 cw(c2.687,16.33) 3.607,16.33 ; 3.607,16.051 ccw(c5.015,16.051) R15.1@4.019,15.055 ; 3.607,16.051 ccw(c5.015,16.051) R15.1@4.019,15.055 ; 3.607,16.051 ccw(c5.015,16.051) R15.1@4.019,15.055 ; 3.607,16.051 ccw(c5.015,16.051) R15.1@4.019,15.055 ; 3.607,16.051 ccw(c5.015,16.051) R15.1@4.019,15.055 ; 3.607,16.33 cw(c4.527,16.33) R14.2@3.876,16.981 ; 3.607,16.33 cw(c4.527,16.33) R14.2@3.876,16.981 ; 3.607,16.33 cw(c4.527,16.33) R14.2@3.876,16.981 ; 3.607,16.33 cw(c4.527,16.33) R14.2@3.876,16.981 ; 3.607,16.33 cw(c4.527,16.33) R14.2@3.876,16.981 ; R15.1@4.019,14.517 cw(c4.67,13.866) 4.67,14.786 ; R15.1@4.019,14.517 cw(c4.67,13.866) 4.67,14.786 ; R15.1@4.019,14.517 cw(c4.67,13.866) 4.67,14.786 ; R15.1@4.019,14.517 cw(c4.67,13.866) 4.67,14.786 ; R15.1@4.019,14.517 cw(c4.67,13.866) 4.67,14.786 ; R15.1@4.019,15.055 ccw(c4.67,15.706) 4.67,14.786 ; R15.1@4.019,15.055 ccw(c4.67,15.706) 4.67,14.786 ; R15.1@4.019,15.055 ccw(c4.67,15.706) 4.67,14.786 ; R15.1@4.019,15.055 ccw(c4.67,15.706) 4.67,14.786 ; R15.1@4.019,15.055 ccw(c4.67,15.706) 4.67,14.786 ; 5.08,14.786 cw(c5.08,13.866) C4.1@5.731,14.517 ; 5.08,14.786 ccw(c5.08,15.706) C4.1@5.731,15.055 ; 5.08,14.786 cw(c5.08,13.866) C4.1@5.731,14.517 ; 5.08,14.786 ccw(c5.08,15.706) C4.1@5.731,15.055 ; 5.08,14.786 cw(c5.08,13.866) C4.1@5.731,14.517 ; 5.08,14.786 ccw(c5.08,15.706) C4.1@5.731,15.055 ; 5.08,14.786 cw(c5.08,13.866) C4.1@5.731,14.517 ; 5.08,14.786 ccw(c5.08,15.706) C4.1@5.731,15.055 ; 5.08,14.786 ccw(c5.08,15.706) C4.1@5.731,15.055 ; 5.08,14.786 cw(c5.08,13.866) C4.1@5.731,14.517 ; C4.1@6.269,14.517 cw(c6.92,13.866) 6.92,14.786 ; C4.1@6.269,14.517 cw(c6.92,13.866) 6.92,14.786 ; C4.1@6.269,14.517 cw(c6.92,13.866) 6.92,14.786 ; C4.1@6.269,14.517 cw(c6.92,13.866) 6.92,14.786 ; C4.1@6.269,14.517 cw(c6.92,13.866) 6.92,14.786 ; C4.1@6.269,15.055 ccw(c6.92,15.706) 6.92,14.786 ; C4.1@6.269,15.055 ccw(c6.92,15.706) 6.92,14.786 ; C4.1@6.269,15.055 ccw(c6.92,15.706) 6.92,14.786 ; C4.1@6.269,15.055 ccw(c6.92,15.706) 6.92,14.786 ; C4.1@6.269,15.055 ccw(c6.92,15.706) 6.92,14.786
NetC4_2: C4.2 R15.2 U2.12 | length 29.4
  Top Layer w0.508: R15.2 C4.2 6.361,12.861 12.618,12.861 13.885,14.128 U2.12 ; R15.2@4.019,12.231 cw(c4.67,11.58) 4.67,12.5 ; R15.2@4.019,12.231 cw(c4.67,11.58) 4.67,12.5 ; R15.2@4.019,12.231 cw(c4.67,11.58) 4.67,12.5 ; R15.2@4.019,12.231 cw(c4.67,11.58) 4.67,12.5 ; R15.2@4.019,12.231 cw(c4.67,11.58) 4.67,12.5 ; R15.2@4.019,12.769 ccw(c4.67,13.42) 4.67,12.5 ; R15.2@4.019,12.769 ccw(c4.67,13.42) 4.67,12.5 ; R15.2@4.019,12.769 ccw(c4.67,13.42) 4.67,12.5 ; R15.2@4.019,12.769 ccw(c4.67,13.42) 4.67,12.5 ; R15.2@4.019,12.769 ccw(c4.67,13.42) 4.67,12.5 ; 5.08,12.5 cw(c5.08,11.58) C4.2@5.731,12.231 ; 5.08,12.5 ccw(c5.08,13.42) C4.2@5.731,12.769 ; 5.08,12.5 cw(c5.08,11.58) C4.2@5.731,12.231 ; 5.08,12.5 ccw(c5.08,13.42) C4.2@5.731,12.769 ; 5.08,12.5 cw(c5.08,11.58) C4.2@5.731,12.231 ; 5.08,12.5 ccw(c5.08,13.42) C4.2@5.731,12.769 ; 5.08,12.5 cw(c5.08,11.58) C4.2@5.731,12.231 ; 5.08,12.5 ccw(c5.08,13.42) C4.2@5.731,12.769 ; 5.08,12.5 ccw(c5.08,13.42) C4.2@5.731,12.769 ; 5.08,12.5 cw(c5.08,11.58) C4.2@5.731,12.231 ; C4.2@6.269,12.358 cw(c7.485,11.142) 7.485,12.861 ccw(c7.485,11.142) C4.2@6.269,12.358
NetC5_1: C5.1 R17.2 R18.2 U2.15 | length 51
  Top Layer w0.508: R18.2 10.393,20.964 C5.1 ; U2.15 10.075,20.182 C5.1 ; R18.2@8.5,22.476 cw(c8.5,21.556) 9.15,22.207 ; R18.2@8.5,22.476 cw(c8.5,21.556) 9.15,22.207 ; R18.2@8.5,22.476 cw(c8.5,21.556) 9.15,22.207 ; R18.2@8.5,22.476 cw(c8.5,21.556) 9.15,22.207 ; R18.2@8.5,22.476 cw(c8.5,21.556) 9.15,22.207 ; R18.2@8.881,22.857 ccw(c9.801,22.857) 9.15,22.207 ; R18.2@8.881,22.857 ccw(c9.801,22.857) 9.15,22.207 ; R18.2@8.881,22.857 ccw(c9.801,22.857) 9.15,22.207 ; R18.2@8.881,22.857 ccw(c9.801,22.857) 9.15,22.207 ; R18.2@8.881,22.857 ccw(c9.801,22.857) 9.15,22.207 ; 9.198,22.159 cw(c7.538,20.5) C5.1@9.885,20.5 ; 9.198,22.159 cw(c7.538,20.5) C5.1@9.885,20.5 ; 9.198,22.159 cw(c7.538,20.5) C5.1@9.885,20.5 ; 9.198,22.159 cw(c7.538,20.5) C5.1@9.885,20.5 ; 9.198,22.159 cw(c7.538,20.5) C5.1@9.885,20.5 ; 10.065,21.292 cw(c9.273,20.5) C5.1 ; 10.065,21.292 cw(c9.273,20.5) C5.1 ; 10.065,21.292 cw(c9.273,20.5) C5.1 ; 10.065,21.292 cw(c9.273,20.5) C5.1 ; 10.065,21.292 cw(c9.273,20.5) C5.1 ; 10.075,16.562 cw(c12.081,16.562) R17.2@10.662,17.981 ; 10.075,16.562 cw(c12.081,16.562) R17.2@10.662,17.981 ; 10.075,16.562 cw(c12.081,16.562) R17.2@10.662,17.981 ; 10.075,16.562 cw(c12.081,16.562) R17.2@10.662,17.981 ; 10.075,16.562 cw(c12.081,16.562) R17.2@10.662,17.981 ; 10.075,19.119 cw(c11.647,19.119) C5.1@10.535,20.231 ; 10.075,19.119 cw(c11.647,19.119) C5.1@10.535,20.231 ; 10.075,19.119 cw(c11.647,19.119) C5.1@10.535,20.231 ; 10.075,19.119 cw(c11.647,19.119) C5.1@10.535,20.231 ; 10.075,19.119 cw(c11.647,19.119) C5.1@10.535,20.231 ; C5.1@10.075,19.938 ccw(c12.081,19.938) R17.2@10.662,18.519 ; C5.1@10.075,19.938 ccw(c12.081,19.938) R17.2@10.662,18.519 ; C5.1@10.075,19.938 ccw(c12.081,19.938) R17.2@10.662,18.519 ; C5.1@10.075,19.938 ccw(c12.081,19.938) R17.2@10.662,18.519 ; C5.1@10.075,19.938 ccw(c12.081,19.938) R17.2@10.662,18.519
NetC5_2: C5.2 E3.2 R17.1 U2.16 | length 46.5
  Top Layer w0.508: E3.2 5.5,22 7,20.5 C5.2 8,20.393 8,17 8.805,16.195 U2.16 ; E3.2@4.28,21.72 cw(c4.956,21.044) 4.956,22 ; E3.2@4.28,21.72 cw(c4.956,21.044) 4.956,22 ; E3.2@4.28,21.72 cw(c4.956,21.044) 4.956,22 ; E3.2@4.28,21.72 cw(c4.956,21.044) 4.956,22 ; E3.2@4.28,21.72 cw(c4.956,21.044) 4.956,22 ; E3.2@4.28,22.28 ccw(c4.956,22.956) 4.956,22 ; E3.2@4.28,22.28 ccw(c4.956,22.956) 4.956,22 ; E3.2@4.28,22.28 ccw(c4.956,22.956) 4.956,22 ; E3.2@4.28,22.28 ccw(c4.956,22.956) 4.956,22 ; E3.2@4.28,22.28 ccw(c4.956,22.956) 4.956,22 ; 7.06,20.5 cw(c7.06,19.58) C5.2@7.711,20.231 ; 7.06,20.5 ccw(c7.06,21.42) C5.2@7.711,20.769 ; 7.06,20.5 cw(c7.06,19.58) C5.2@7.711,20.231 ; 7.06,20.5 ccw(c7.06,21.42) C5.2@7.711,20.769 ; 7.06,20.5 cw(c7.06,19.58) C5.2@7.711,20.231 ; 7.06,20.5 ccw(c7.06,21.42) C5.2@7.711,20.769 ; 7.06,20.5 cw(c7.06,19.58) C5.2@7.711,20.231 ; 7.06,20.5 ccw(c7.06,21.42) C5.2@7.711,20.769 ; 7.06,20.5 ccw(c7.06,21.42) C5.2@7.711,20.769 ; 7.06,20.5 cw(c7.06,19.58) C5.2@7.711,20.231 ; C5.2@7.711,20.231 cw(c7.012,19.532) 8,19.532 ; C5.2@7.711,20.231 cw(c7.012,19.532) 8,19.532 ; C5.2@7.711,20.231 cw(c7.012,19.532) 8,19.532 ; C5.2@7.711,20.231 cw(c7.012,19.532) 8,19.532 ; C5.2@7.711,20.231 cw(c7.012,19.532) 8,19.532 ; R17.1@7.838,17.981 cw(c7.446,17.589) 8,17.589 ; R17.1@7.838,17.981 cw(c7.446,17.589) 8,17.589 ; R17.1@7.838,17.981 cw(c7.446,17.589) 8,17.589 ; R17.1@7.838,17.981 cw(c7.446,17.589) 8,17.589 ; R17.1@7.838,17.981 cw(c7.446,17.589) 8,17.589 ; R17.1@7.838,18.519 ccw(c7.446,18.911) 8,18.911 ; R17.1@7.838,18.519 ccw(c7.446,18.911) 8,18.911 ; R17.1@7.838,18.519 ccw(c7.446,18.911) 8,18.911 ; R17.1@7.838,18.519 ccw(c7.446,18.911) 8,18.911 ; R17.1@7.838,18.519 ccw(c7.446,18.911) 8,18.911 ; 8,17.072 cw(c9.285,17.072) R17.1@8.376,17.981 ; 8,17.072 cw(c9.285,17.072) R17.1@8.376,17.981 ; 8,17.072 cw(c9.285,17.072) R17.1@8.376,17.981 ; 8,17.072 cw(c9.285,17.072) R17.1@8.376,17.981 ; 8,17.072 cw(c9.285,17.072) R17.1@8.376,17.981 ; 8,19.428 ccw(c9.285,19.428) R17.1@8.376,18.519 ; 8,19.428 ccw(c9.285,19.428) R17.1@8.376,18.519 ; 8,19.428 ccw(c9.285,19.428) R17.1@8.376,18.519 ; 8,19.428 ccw(c9.285,19.428) R17.1@8.376,18.519 ; 8,19.428 ccw(c9.285,19.428) R17.1@8.376,18.519 ; 8,19.628 cw(c8.852,19.628) C5.2@8.249,20.231 ; 8,19.628 cw(c8.852,19.628) C5.2@8.249,20.231 ; 8,19.628 cw(c8.852,19.628) C5.2@8.249,20.231 ; 8,19.628 cw(c8.852,19.628) C5.2@8.249,20.231 ; 8,19.628 cw(c8.852,19.628) C5.2@8.249,20.231
NetC6_1: C6.1 PRI1.2 R19.2 U2.14 | length 49
  Top Layer w0.508: U2.14 11.345,16.595 12.25,17.5 12.25,21.25 14,23 C6.1 R19.2 19.529,23.107 PRI1.2 ; U2.14@11.396,16.255 cw(c12.339,16.255) 11.672,16.922 ; U2.14@11.396,16.255 cw(c12.339,16.255) 11.672,16.922 ; U2.14@11.396,16.255 cw(c12.339,16.255) 11.672,16.922 ; U2.14@11.396,16.255 cw(c12.339,16.255) 11.672,16.922 ; U2.14@11.396,16.255 cw(c12.339,16.255) 11.672,16.922 ; 13.315,22.315 cw(c14,21.631) C6.1@14,22.599 ; 13.315,22.315 cw(c14,21.631) C6.1@14,22.599 ; 13.315,22.315 cw(c14,21.631) C6.1@14,22.599 ; 13.315,22.315 cw(c14,21.631) C6.1@14,22.599 ; 13.315,22.315 cw(c14,21.631) C6.1@14,22.599 ; 13.364,22.364 ccw(c12.747,22.98) C6.1@13.619,22.98 ; 13.364,22.364 ccw(c12.747,22.98) C6.1@13.619,22.98 ; 13.364,22.364 ccw(c12.747,22.98) C6.1@13.619,22.98 ; 13.364,22.364 ccw(c12.747,22.98) C6.1@13.619,22.98 ; 13.364,22.364 ccw(c12.747,22.98) C6.1@13.619,22.98 ; C6.1@14.269,22.838 cw(c14.92,22.187) 14.92,23.107 ; C6.1@14.269,22.838 cw(c14.92,22.187) 14.92,23.107 ; C6.1@14.269,22.838 cw(c14.92,22.187) 14.92,23.107 ; C6.1@14.269,22.838 cw(c14.92,22.187) 14.92,23.107 ; C6.1@14.269,22.838 cw(c14.92,22.187) 14.92,23.107 ; C6.1@14.269,23.376 ccw(c14.92,24.027) 14.92,23.107 ; C6.1@14.269,23.376 ccw(c14.92,24.027) 14.92,23.107 ; C6.1@14.269,23.376 ccw(c14.92,24.027) 14.92,23.107 ; C6.1@14.269,23.376 ccw(c14.92,24.027) 14.92,23.107 ; C6.1@14.269,23.376 ccw(c14.92,24.027) 14.92,23.107 ; 15.33,23.107 cw(c15.33,22.187) R19.2@15.981,22.838 ; 15.33,23.107 ccw(c15.33,24.027) R19.2@15.981,23.376 ; 15.33,23.107 cw(c15.33,22.187) R19.2@15.981,22.838 ; 15.33,23.107 ccw(c15.33,24.027) R19.2@15.981,23.376 ; 15.33,23.107 cw(c15.33,22.187) R19.2@15.981,22.838 ; 15.33,23.107 ccw(c15.33,24.027) R19.2@15.981,23.376 ; 15.33,23.107 cw(c15.33,22.187) R19.2@15.981,22.838 ; 15.33,23.107 ccw(c15.33,24.027) R19.2@15.981,23.376 ; 15.33,23.107 ccw(c15.33,24.027) R19.2@15.981,23.376 ; 15.33,23.107 cw(c15.33,22.187) R19.2@15.981,22.838 ; R19.2@16.519,22.838 cw(c17.17,22.187) 17.17,23.107 ; R19.2@16.519,22.838 cw(c17.17,22.187) 17.17,23.107 ; R19.2@16.519,22.838 cw(c17.17,22.187) 17.17,23.107 ; R19.2@16.519,22.838 cw(c17.17,22.187) 17.17,23.107 ; R19.2@16.519,22.838 cw(c17.17,22.187) 17.17,23.107 ; R19.2@16.519,23.376 ccw(c17.17,24.027) 17.17,23.107 ; R19.2@16.519,23.376 ccw(c17.17,24.027) 17.17,23.107 ; R19.2@16.519,23.376 ccw(c17.17,24.027) 17.17,23.107 ; R19.2@16.519,23.376 ccw(c17.17,24.027) 17.17,23.107 ; R19.2@16.519,23.376 ccw(c17.17,24.027) 17.17,23.107
NetC7_1: C7.1 R16.1 U2.4 | length 26.1
  Top Layer w0.508: U2.4 12.615,4.528 C7.1 ; 12.615,4.909 cw(c14.484,4.909) R16.1@13.162,6.231 ; 12.615,4.909 cw(c14.484,4.909) R16.1@13.162,6.231 ; 12.615,4.909 cw(c14.484,4.909) R16.1@13.162,6.231 ; 12.615,4.909 cw(c14.484,4.909) R16.1@13.162,6.231 ; 12.615,4.909 cw(c14.484,4.909) R16.1@13.162,6.231 ; 12.615,5.534 ccw(c14.05,5.534) C7.1@13.035,4.519 ; 12.615,5.534 ccw(c14.05,5.534) C7.1@13.035,4.519 ; 12.615,5.534 ccw(c14.05,5.534) C7.1@13.035,4.519 ; 12.615,5.534 ccw(c14.05,5.534) C7.1@13.035,4.519 ; 12.615,5.534 ccw(c14.05,5.534) C7.1@13.035,4.519 ; 12.615,8.091 ccw(c14.484,8.091) R16.1@13.162,6.769 ; 12.615,8.091 ccw(c14.484,8.091) R16.1@13.162,6.769 ; 12.615,8.091 ccw(c14.484,8.091) R16.1@13.162,6.769 ; 12.615,8.091 ccw(c14.484,8.091) R16.1@13.162,6.769 ; 12.615,8.091 ccw(c14.484,8.091) R16.1@13.162,6.769
NetC8_2: C8.2 R13.2 U2.5 | length 27.8
  Top Layer w0.508: U2.5 13.885,8.115 15.357,6.643 C8.2 ; 14.179,7.821 cw(c12.857,6.5) R13.2@14.726,6.5 ; 14.179,7.821 cw(c12.857,6.5) R13.2@14.726,6.5 ; 14.179,7.821 cw(c12.857,6.5) R13.2@14.726,6.5 ; 14.179,7.821 cw(c12.857,6.5) R13.2@14.726,6.5 ; 14.179,7.821 cw(c12.857,6.5) R13.2@14.726,6.5 ; R13.2@14.838,6.231 cw(c13.584,4.977) 15.357,4.977 ; R13.2@14.838,6.231 cw(c13.584,4.977) 15.357,4.977 ; R13.2@14.838,6.231 cw(c13.584,4.977) 15.357,4.977 ; R13.2@14.838,6.231 cw(c13.584,4.977) 15.357,4.977 ; R13.2@14.838,6.231 cw(c13.584,4.977) 15.357,4.977 ; C8.2@15.088,4.519 ccw(c14.437,5.17) 15.357,5.17 ; C8.2@15.088,4.519 ccw(c14.437,5.17) 15.357,5.17 ; C8.2@15.088,4.519 ccw(c14.437,5.17) 15.357,5.17 ; C8.2@15.088,4.519 ccw(c14.437,5.17) 15.357,5.17 ; C8.2@15.088,4.519 ccw(c14.437,5.17) 15.357,5.17 ; 15.357,5.17 ccw(c16.277,5.17) C8.2@15.626,4.519 ; 15.357,5.17 ccw(c16.277,5.17) C8.2@15.626,4.519 ; 15.357,5.17 ccw(c16.277,5.17) C8.2@15.626,4.519 ; 15.357,5.17 ccw(c16.277,5.17) C8.2@15.626,4.519 ; 15.357,5.17 ccw(c16.277,5.17) C8.2@15.626,4.519
NetD1_K: D1.K D2.K Q2.3 R1.1 R3.1 SCR1.2 | length 140.6
  Top Layer w1.016: Q2.3 37.886,23.393 R3.1 40.817,23.46 42,23.46 ; SCR1.2 42,27.648 42,23.46 ; R1.1 42,23.46 ; SCR1.2@39.665,27.791 cw(c36.599,23.345) 42,23.345 ; SCR1.2@39.665,27.791 cw(c36.599,23.345) 42,23.345 ; SCR1.2@39.665,27.791 cw(c36.599,23.345) 42,23.345 ; SCR1.2@39.665,27.791 cw(c36.599,23.345) 42,23.345 ; SCR1.2@39.665,27.791 cw(c36.599,23.345) 42,23.345 ; SCR1.2@40.242,28.628 cw(c37.933,25.28) 42,25.28 ; SCR1.2@40.242,28.628 cw(c37.933,25.28) 42,25.28 ; SCR1.2@40.242,28.628 cw(c37.933,25.28) 42,25.28 ; SCR1.2@40.242,28.628 cw(c37.933,25.28) 42,25.28 ; SCR1.2@40.242,28.628 cw(c37.933,25.28) 42,25.28
  Top Layer w1.27: D2.K 13.642,38.608 15.25,37 25.25,37 25.75,36.5 32.905,36.5 D1.K 38.122,35.877 40.184,33.816 ; SCR1.2 40.184,33.816 ; 30.941,36.5 cw(c30.941,33.608) D1.K@32.986,35.653 ; 30.941,36.5 cw(c30.941,33.608) D1.K@32.986,35.653 ; 30.941,36.5 cw(c30.941,33.608) D1.K@32.986,35.653 ; 30.941,36.5 cw(c30.941,33.608) D1.K@32.986,35.653 ; 30.941,36.5 cw(c30.941,33.608) D1.K@32.986,35.653 ; SCR1.2@38.892,30.864 ccw(c36.166,33.816) 40.184,33.816 ; SCR1.2@38.892,30.864 ccw(c36.166,33.816) 40.184,33.816 ; SCR1.2@38.892,30.864 ccw(c36.166,33.816) 40.184,33.816 ; SCR1.2@38.892,30.864 ccw(c36.166,33.816) 40.184,33.816 ; SCR1.2@38.892,30.864 ccw(c36.166,33.816) 40.184,33.816 ; 40.184,33.816 ccw(c44.202,33.816) SCR1.2@41.476,30.864 ; 40.184,33.816 ccw(c44.202,33.816) SCR1.2@41.476,30.864 ; 40.184,33.816 ccw(c44.202,33.816) SCR1.2@41.476,30.864 ; 40.184,33.816 ccw(c44.202,33.816) SCR1.2@41.476,30.864 ; 40.184,33.816 ccw(c44.202,33.816) SCR1.2@41.476,30.864
NetD3_A: D3.A R5.1 | length 77.1
  Top Layer w0.508: R5.1 4.29,2.46 5.889,0.861 43.611,0.861 45,2.25 45,6.25 42.75,8.5 38.992,8.5 D3.A ; R5.1@3.932,5.852 cw(c3.068,4.988) 4.29,4.988 ; R5.1@3.932,5.852 cw(c3.068,4.988) 4.29,4.988 ; R5.1@3.932,5.852 cw(c3.068,4.988) 4.29,4.988 ; R5.1@3.932,5.852 cw(c3.068,4.988) 4.29,4.988 ; R5.1@3.932,5.852 cw(c3.068,4.988) 4.29,4.988 ; 4.29,4.988 cw(c5.512,4.988) R5.1@4.648,5.852 ; 4.29,4.988 cw(c5.512,4.988) R5.1@4.648,5.852 ; 4.29,4.988 cw(c5.512,4.988) R5.1@4.648,5.852 ; 4.29,4.988 cw(c5.512,4.988) R5.1@4.648,5.852 ; 4.29,4.988 cw(c5.512,4.988) R5.1@4.648,5.852 ; D3.A@37.992,9.004 cw(c37.992,7.807) 38.839,8.653 ; D3.A@37.992,9.004 cw(c37.992,7.807) 38.839,8.653 ; D3.A@37.992,9.004 cw(c37.992,7.807) 38.839,8.653 ; D3.A@37.992,9.004 cw(c37.992,7.807) 38.839,8.653 ; D3.A@37.992,9.004 cw(c37.992,7.807) 38.839,8.653 ; D3.A@38.488,9.5 ccw(c39.686,9.5) 38.839,8.653 ; D3.A@38.488,9.5 ccw(c39.686,9.5) 38.839,8.653 ; D3.A@38.488,9.5 ccw(c39.686,9.5) 38.839,8.653 ; D3.A@38.488,9.5 ccw(c39.686,9.5) 38.839,8.653 ; D3.A@38.488,9.5 ccw(c39.686,9.5) 38.839,8.653
NetD3_K: D3.K Q2.2 R9.2 | length 41.9
  Top Layer w0.762: D3.K 37.75,13 36.5,14.25 36.5,17.857 38.703,20.06 Q2.2 ; 36.5,16.584 cw(c39.309,16.584) R9.2@37.323,18.57 ; 36.5,16.584 cw(c39.309,16.584) R9.2@37.323,18.57 ; 36.5,16.584 cw(c39.309,16.584) R9.2@37.323,18.57 ; 36.5,16.584 cw(c39.309,16.584) R9.2@37.323,18.57 ; 36.5,16.584 cw(c39.309,16.584) R9.2@37.323,18.57 ; 36.5,17.65 cw(c37.369,17.65) R9.2@37.194,18.501 ; 36.5,17.65 cw(c37.369,17.65) R9.2@37.194,18.501 ; 36.5,17.65 cw(c37.369,17.65) R9.2@37.194,18.501 ; 36.5,17.65 cw(c37.369,17.65) R9.2@37.194,18.501 ; 36.5,17.65 cw(c37.369,17.65) R9.2@37.194,18.501 ; 36.625,17.982 ccw(c35.974,18.633) R9.2@36.89,18.725 ; 36.625,17.982 ccw(c35.974,18.633) R9.2@36.89,18.725 ; 36.625,17.982 ccw(c35.974,18.633) R9.2@36.89,18.725 ; 36.625,17.982 ccw(c35.974,18.633) R9.2@36.89,18.725 ; 36.625,17.982 ccw(c35.974,18.633) R9.2@36.89,18.725 ; 36.938,13.812 ccw(c38.008,14.882) D3.K@38.008,13.369 ; 36.938,13.812 ccw(c38.008,14.882) D3.K@38.008,13.369 ; 36.938,13.812 ccw(c38.008,14.882) D3.K@38.008,13.369 ; 36.938,13.812 ccw(c38.008,14.882) D3.K@38.008,13.369 ; 36.938,13.812 ccw(c38.008,14.882) D3.K@38.008,13.369 ; R9.2@37.143,19.004 ccw(c37.143,20.221) 38.003,19.36 ; R9.2@37.143,19.004 ccw(c37.143,20.221) 38.003,19.36 ; R9.2@37.143,19.004 ccw(c37.143,20.221) 38.003,19.36 ; R9.2@37.143,19.004 ccw(c37.143,20.221) 38.003,19.36 ; R9.2@37.143,19.004 ccw(c37.143,20.221) 38.003,19.36
NetD4_A: D4.A Q2.1 R8.2 Z2.K | length 25.5
  Top Layer w1.016: Z2.K 31,23.122 D4.A ; R8.2 31.193,20.75 36.063,20.75 ; Q2.1 36.063,20.75 ; 35.148,20.75 ccw(c35.148,23.133) Q2.1@36.833,21.448 ; 35.148,20.75 ccw(c35.148,23.133) Q2.1@36.833,21.448 ; 35.148,20.75 ccw(c35.148,23.133) Q2.1@36.833,21.448 ; 35.148,20.75 ccw(c35.148,23.133) Q2.1@36.833,21.448 ; 35.148,20.75 ccw(c35.148,23.133) Q2.1@36.833,21.448 ; 36.064,20.75 ccw(c36.064,21.537) Q2.1@36.848,21.48 ; 36.064,20.75 ccw(c36.064,21.537) Q2.1@36.848,21.48 ; 36.064,20.75 ccw(c36.064,21.537) Q2.1@36.848,21.48 ; 36.064,20.75 ccw(c36.064,21.537) Q2.1@36.848,21.48 ; 36.064,20.75 ccw(c36.064,21.537) Q2.1@36.848,21.48
NetD4_K: D4.K E1.1 Q1.2 R6.1 | length 34.2
  Top Layer w0.508: 34.41,11.34 34.5,11.25 38.75,11.25 39,11.25 40.202,10.048 Q1.2 ; 39.48,10.77 ccw(c40.734,12.024) Q1.2@40.734,10.251 ; 39.48,10.77 ccw(c40.734,12.024) Q1.2@40.734,10.251 ; 39.48,10.77 ccw(c40.734,12.024) Q1.2@40.734,10.251 ; 39.48,10.77 ccw(c40.734,12.024) Q1.2@40.734,10.251 ; 39.48,10.77 ccw(c40.734,12.024) Q1.2@40.734,10.251 ; 40.243,10.048 cw(c40.243,9.557) Q1.2@40.59,9.904 ; 40.243,10.048 ccw(c40.243,10.538) Q1.2@40.59,10.191 ; 40.243,10.048 cw(c40.243,9.557) Q1.2@40.59,9.904 ; 40.243,10.048 ccw(c40.243,10.538) Q1.2@40.59,10.191 ; 40.243,10.048 cw(c40.243,9.557) Q1.2@40.59,9.904 ; 40.243,10.048 ccw(c40.243,10.538) Q1.2@40.59,10.191 ; 40.243,10.048 cw(c40.243,9.557) Q1.2@40.59,9.904 ; 40.243,10.048 ccw(c40.243,10.538) Q1.2@40.59,10.191 ; 40.243,10.048 ccw(c40.243,10.538) Q1.2@40.59,10.191 ; 40.243,10.048 cw(c40.243,9.557) Q1.2@40.59,9.904
  Top Layer w1.016: D4.K 31,12.5 31.5,12 33.75,12 34.41,11.34 ; 34.5,11.25 35,10.75 R6.1 ; 31,13.55 ccw(c33.05,13.55) 31.6,12.1 ; 31,13.55 ccw(c33.05,13.55) 31.6,12.1 ; 31,13.55 ccw(c33.05,13.55) 31.6,12.1 ; 31,13.55 ccw(c33.05,13.55) 31.6,12.1
NetE3_1: E3.1 R14.1 | length 29.8
  Top Layer w0.508: E3.1 6.143,17.857 R14.1@6.143,17.25 ; E3.1@4,19.604 cw(c4,18.648) 4.676,19.324 ; E3.1@4,19.604 cw(c4,18.648) 4.676,19.324 ; E3.1@4,19.604 cw(c4,18.648) 4.676,19.324 ; E3.1@4,19.604 cw(c4,18.648) 4.676,19.324 ; E3.1@4,19.604 cw(c4,18.648) 4.676,19.324 ; E3.1@4.396,20 ccw(c5.352,20) 4.676,19.324 ; E3.1@4.396,20 ccw(c5.352,20) 4.676,19.324 ; E3.1@4.396,20 ccw(c5.352,20) 4.676,19.324 ; E3.1@4.396,20 ccw(c5.352,20) 4.676,19.324 ; E3.1@4.396,20 ccw(c5.352,20) 4.676,19.324 ; 4.637,19.363 cw(c2.523,17.25) R14.1@5.512,17.25 ; 4.637,19.363 cw(c2.523,17.25) R14.1@5.512,17.25 ; 4.637,19.363 cw(c2.523,17.25) R14.1@5.512,17.25 ; 4.637,19.363 cw(c2.523,17.25) R14.1@5.512,17.25 ; 4.637,19.363 cw(c2.523,17.25) R14.1@5.512,17.25 ; 5.504,18.496 cw(c4.258,17.25) R14.1@6.02,17.25 ; 5.504,18.496 cw(c4.258,17.25) R14.1@6.02,17.25 ; 5.504,18.496 cw(c4.258,17.25) R14.1@6.02,17.25 ; 5.504,18.496 cw(c4.258,17.25) R14.1@6.02,17.25 ; 5.504,18.496 cw(c4.258,17.25) R14.1@6.02,17.25
NetE4_1: E4.1 R18.1 | length 30.4
  Top Layer w0.508: E4.1 7.893,25.75 R18.1 ; E4.1@4.78,25.47 cw(c5.456,24.794) 5.456,25.75 ; E4.1@4.78,25.47 cw(c5.456,24.794) 5.456,25.75 ; E4.1@4.78,25.47 cw(c5.456,24.794) 5.456,25.75 ; E4.1@4.78,25.47 cw(c5.456,24.794) 5.456,25.75 ; E4.1@4.78,25.47 cw(c5.456,24.794) 5.456,25.75 ; E4.1@4.78,26.03 ccw(c5.456,26.706) 5.456,25.75 ; E4.1@4.78,26.03 ccw(c5.456,26.706) 5.456,25.75 ; E4.1@4.78,26.03 ccw(c5.456,26.706) 5.456,25.75 ; E4.1@4.78,26.03 ccw(c5.456,26.706) 5.456,25.75 ; E4.1@4.78,26.03 ccw(c5.456,26.706) 5.456,25.75 ; 6.115,25.75 cw(c6.115,22.758) R18.1@8.231,24.874 ; 6.115,25.75 cw(c6.115,22.758) R18.1@8.231,24.874 ; 6.115,25.75 cw(c6.115,22.758) R18.1@8.231,24.874 ; 6.115,25.75 cw(c6.115,22.758) R18.1@8.231,24.874 ; 6.115,25.75 cw(c6.115,22.758) R18.1@8.231,24.874 ; 7.341,25.75 cw(c7.341,23.984) R18.1@8.59,25.233 ; 7.341,25.75 cw(c7.341,23.984) R18.1@8.59,25.233 ; 7.341,25.75 cw(c7.341,23.984) R18.1@8.59,25.233 ; 7.341,25.75 cw(c7.341,23.984) R18.1@8.59,25.233 ; 7.341,25.75 cw(c7.341,23.984) R18.1@8.59,25.233
NetQ1_1: Q1.1 R4.2 Z1.K | length 17.7
  Top Layer w1.016: Z1.K 38.865,16.357 R4.2 40.734,16.341 Q1.1 ; Z1.K@38.421,15.571 cw(c40.318,13.674) R4.2@40.318,16.357 ; Z1.K@38.421,15.571 cw(c40.318,13.674) R4.2@40.318,16.357 ; Z1.K@38.421,15.571 cw(c40.318,13.674) R4.2@40.318,16.357 ; Z1.K@38.421,15.571 cw(c40.318,13.674) R4.2@40.318,16.357 ; Z1.K@38.421,15.571 cw(c40.318,13.674) R4.2@40.318,16.357
NetQ1_3: Q1.3 R2.2 | length 15.4
  Top Layer w1.016: Q1.3 43.5,11.721 ; R2.2 43.5,11.721 ; Q1.3@42.962,10.94 ccw(c42.664,11.721) 43.5,11.721 ; Q1.3@42.962,10.94 ccw(c42.664,11.721) 43.5,11.721 ; Q1.3@42.962,10.94 ccw(c42.664,11.721) 43.5,11.721 ; Q1.3@42.962,10.94 ccw(c42.664,11.721) 43.5,11.721 ; Q1.3@42.962,10.94 ccw(c42.664,11.721) 43.5,11.721 ; Q1.3@42.98,10.951 ccw(c41.724,12.207) 43.5,12.207 ; Q1.3@42.98,10.951 ccw(c41.724,12.207) 43.5,12.207 ; Q1.3@42.98,10.951 ccw(c41.724,12.207) 43.5,12.207 ; Q1.3@42.98,10.951 ccw(c41.724,12.207) 43.5,12.207 ; Q1.3@42.98,10.951 ccw(c41.724,12.207) 43.5,12.207
NetR1_2: R1.2 R2.1 | length 2.6
  Top Layer w1.27: R2.1 R1.2
NetR3_2: R3.2 R4.1 | length 2.5
  Top Layer w1.27: R4.1 R3.2
NetR7_2: R7.2 SCR1.3 Z2.A | length 23.3
  Top Layer w1.016: R7.2 30.607,27.031 Z2.A 31.518,27.164 SCR1.3 ; 30.607,28.164 ccw(c32.518,28.164) Z2.A@31.167,26.813 ; 30.607,28.164 ccw(c32.518,28.164) Z2.A@31.167,26.813 ; 30.607,28.164 ccw(c32.518,28.164) Z2.A@31.167,26.813 ; 30.607,28.164 ccw(c32.518,28.164) Z2.A@31.167,26.813 ; 30.607,28.164 ccw(c32.518,28.164) Z2.A@31.167,26.813 ; Z2.A@31.167,26.471 cw(c32.84,24.798) 32.84,27.164 ; Z2.A@31.167,26.471 cw(c32.84,24.798) 32.84,27.164 ; Z2.A@31.167,26.471 cw(c32.84,24.798) 32.84,27.164 ; Z2.A@31.167,26.471 cw(c32.84,24.798) 32.84,27.164 ; Z2.A@31.167,26.471 cw(c32.84,24.798) 32.84,27.164
NetR11_1: R11.1 R12.2 U2.9 | length 27
  Top Layer w0.508: U2.9 19.25,15.544 ; R12.2 19.25,15.607 19.25,15.544 ; R11.1 19.25,13.643 19.25,15.544 ; 19.25,14.353 ccw(c21.4,14.353) R11.1@19.912,12.801 ; 19.25,14.353 ccw(c21.4,14.353) R11.1@19.912,12.801 ; 19.25,14.353 ccw(c21.4,14.353) R11.1@19.912,12.801 ; 19.25,15.544 ccw(c22.541,15.544) R11.1@20.264,13.168 ; 19.25,15.544 ccw(c22.541,15.544) R11.1@20.264,13.168 ; 19.25,15.544 ccw(c22.541,15.544) R11.1@20.264,13.168 ; 19.25,16.687 cw(c20.17,16.687) 19.519,17.338 ccw(c20.17,16.687) 19.25,16.687 ; 19.25,16.687 ccw(c18.33,16.687) 18.981,17.338 cw(c18.33,16.687) 19.25,16.687 ; 19.35,13.543 cw(c18.699,12.893) R11.1@19.619,12.893 ; 19.35,13.543 ccw(c20,14.194) R11.1@20,13.274 ; 19.35,13.543 cw(c18.699,12.893) R11.1@19.619,12.893 ; 19.35,13.543 ccw(c20,14.194) R11.1@20,13.274 ; 19.35,13.543 ccw(c20,14.194) R11.1@20,13.274 ; 19.35,13.543 cw(c18.699,12.893) R11.1@19.619,12.893
NetR12_1: R12.1 RG1.2 | length 8.2
  Top Layer w0.508: R12.1 20.607,19.893 21.26,19.24 RG1.2 ; 20.17,19.893 cw(c20.17,20.813) 19.519,20.162 ccw(c20.17,20.813) 20.17,19.893 ; 20.17,19.893 ccw(c20.17,18.973) 19.519,19.624 cw(c20.17,18.973) 20.17,19.893
NetR13_1: R13.1 U2.6 | length 16.9
  Top Layer w0.508: U2.6 15.155,8.738 R13.1 ; U2.6@15.206,9.245 ccw(c16.552,9.245) 15.6,8.293 ; U2.6@15.206,9.245 ccw(c16.552,9.245) 15.6,8.293 ; U2.6@15.206,9.245 ccw(c16.552,9.245) 15.6,8.293 ; U2.6@15.206,9.245 ccw(c16.552,9.245) 15.6,8.293 ; U2.6@15.206,9.245 ccw(c16.552,9.245) 15.6,8.293 ; 16.743,7.15 cw(c16.092,6.5) R13.1@17.012,6.5 ; 16.743,7.15 ccw(c17.393,7.801) R13.1@17.393,6.881 ; 16.743,7.15 cw(c16.092,6.5) R13.1@17.012,6.5 ; 16.743,7.15 ccw(c17.393,7.801) R13.1@17.393,6.881 ; 16.743,7.15 cw(c16.092,6.5) R13.1@17.012,6.5 ; 16.743,7.15 ccw(c17.393,7.801) R13.1@17.393,6.881 ; 16.743,7.15 cw(c16.092,6.5) R13.1@17.012,6.5 ; 16.743,7.15 ccw(c17.393,7.801) R13.1@17.393,6.881 ; 16.743,7.15 ccw(c17.393,7.801) R13.1@17.393,6.881 ; 16.743,7.15 cw(c16.092,6.5) R13.1@17.012,6.5
NetR16_2: R16.2 U2.3 | length 33.2
  Top Layer w0.508: R16.2 11.345,7.238 U2.3 ; R16.2@10.338,6.769 ccw(c7.905,9.202) U2.3@11.345,9.202 ; R16.2@10.338,6.769 ccw(c7.905,9.202) U2.3@11.345,9.202 ; R16.2@10.338,6.769 ccw(c7.905,9.202) U2.3@11.345,9.202 ; R16.2@10.338,6.769 ccw(c7.905,9.202) U2.3@11.345,9.202 ; R16.2@10.338,6.769 ccw(c7.905,9.202) U2.3@11.345,9.202 ; R16.2@10.607,6.881 ccw(c10.607,7.801) 11.257,7.15 ; R16.2@10.607,6.881 ccw(c10.607,7.801) 11.257,7.15 ; R16.2@10.607,6.881 ccw(c10.607,7.801) 11.257,7.15 ; R16.2@10.607,6.881 ccw(c10.607,7.801) 11.257,7.15 ; R16.2@10.607,6.881 ccw(c10.607,7.801) 11.257,7.15 ; R16.2@10.697,6.41 ccw(c9.132,7.975) 11.345,7.975 ; R16.2@10.697,6.41 ccw(c9.132,7.975) 11.345,7.975 ; R16.2@10.697,6.41 ccw(c9.132,7.975) 11.345,7.975 ; R16.2@10.697,6.41 ccw(c9.132,7.975) 11.345,7.975 ; R16.2@10.697,6.41 ccw(c9.132,7.975) 11.345,7.975 ; R16.2@10.988,6.5 cw(c11.908,6.5) 11.257,7.15 ; R16.2@10.988,6.5 cw(c11.908,6.5) 11.257,7.15 ; R16.2@10.988,6.5 cw(c11.908,6.5) 11.257,7.15 ; R16.2@10.988,6.5 cw(c11.908,6.5) 11.257,7.15 ; R16.2@10.988,6.5 cw(c11.908,6.5) 11.257,7.15
NetR20_2: R20.2 U2.10 | length 17.9
  Top Layer w0.508: U2.10 16.425,17.782 R20.2 ; U2.10@16.425,16.2 cw(c18.943,16.2) R20.2@17.162,17.981 ; U2.10@16.425,16.2 cw(c18.943,16.2) R20.2@17.162,17.981 ; U2.10@16.425,16.2 cw(c18.943,16.2) R20.2@17.162,17.981 ; U2.10@16.425,16.2 cw(c18.943,16.2) R20.2@17.162,17.981 ; U2.10@16.425,16.2 cw(c18.943,16.2) R20.2@17.162,17.981 ; 16.425,17.427 cw(c17.716,17.427) R20.2@16.803,18.34 ; 16.425,17.427 cw(c17.716,17.427) R20.2@16.803,18.34 ; 16.425,17.427 cw(c17.716,17.427) R20.2@16.803,18.34 ; 16.425,17.427 cw(c17.716,17.427) R20.2@16.803,18.34 ; 16.425,17.427 cw(c17.716,17.427) R20.2@16.803,18.34
pads on no net: LENS1.0

## Polygon pours and split planes (outlines as drawn)
GND on Top Layer "TopLayer-No Net" (solid, remove dead copper, pour order 1000): 0,28.5 0,0 26.5,0 26.5,8.5 27,8.5 27,18 26,18 26,23 20.5,28.5 0,28.5

## Keep-outs
Keep-Out Layer:
  the board outline again, w0.254

## Other copper
Top Layer:
  region net NetD4_K: 34,10 34,7.5 36,7.5 36,13 30.5,13 30.5,10
  region net GND: 26,35 26,28.5 29,28.5 29,31.5 32.5,31.5 32.5,31 35.5,31 35.5,33 30,33 30,35
  region net NetR7_2: 30,30.5 30,26 35.5,26 31,30.5
  region net L1: 20.5,47 2.5,47 2.5,32.5 5.5,32.5 5.5,41 6.5,42 15,42 18,39 20.5,39
  region net L: 25.5,47 43.5,47 43.5,40 30,40 30,38 27,38 27,39 23,39 23,41 25.5,41
  region net NetD1_K: 31.75,38 45,38 45,23 37.25,23 37.25,34.75 31.75,34.75
  region net +3.3V: 22.5,1.75 29.5,1.75 29.5,3 28.5,4.5 24.5,5 23,6.5 22.5,6.5

## Silkscreen, mask and mechanical layers (free items; w line width, h text height)
Top Overlay:
  lines w0.254: 0,50.746 0,51.254 ; 1.524,50.492 0,51 ; 1.524,51.508 0,51 ; 17.736,51 0,51 ; 28.264,51 46,51 ; 44.476,50.492 46,51 ; 44.476,51.508 46,51 ; 46,50.746 46,51.254 ; 48.492,1.524 49,0 ; 48.492,46.476 49,48 ; 48.746,0 49.254,0 ; 48.746,48 49.254,48 ; 49,18.736 49,0 ; 49,29.264 49,48 ; 49.508,1.524 49,0 ; 49.508,46.476 49,48
  text "46 (mm)" at 17.99,49.687 h1.52
  text "L1" at 12,45.5 h1.52
  text "L" at 32.5,45.5 h1.52
  text "48 (mm)" at 50.313,18.99 h1.52 r90
Bottom Overlay:
  text "CZ101" at 25,5 h1.52
  text "V1.0" at 24.25,2.5 h1.52